# EAGLE board GPS-L86-M33-V0.1 (EAGLE 9.6.2)
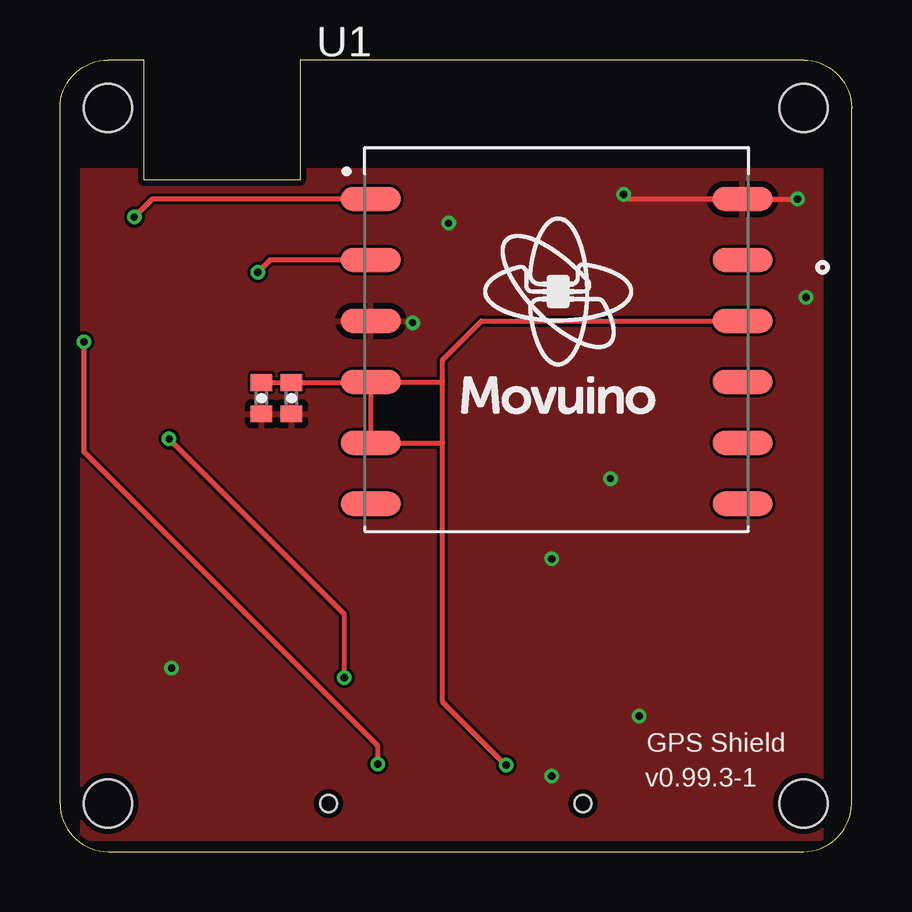
[diagram p0: board, top side]
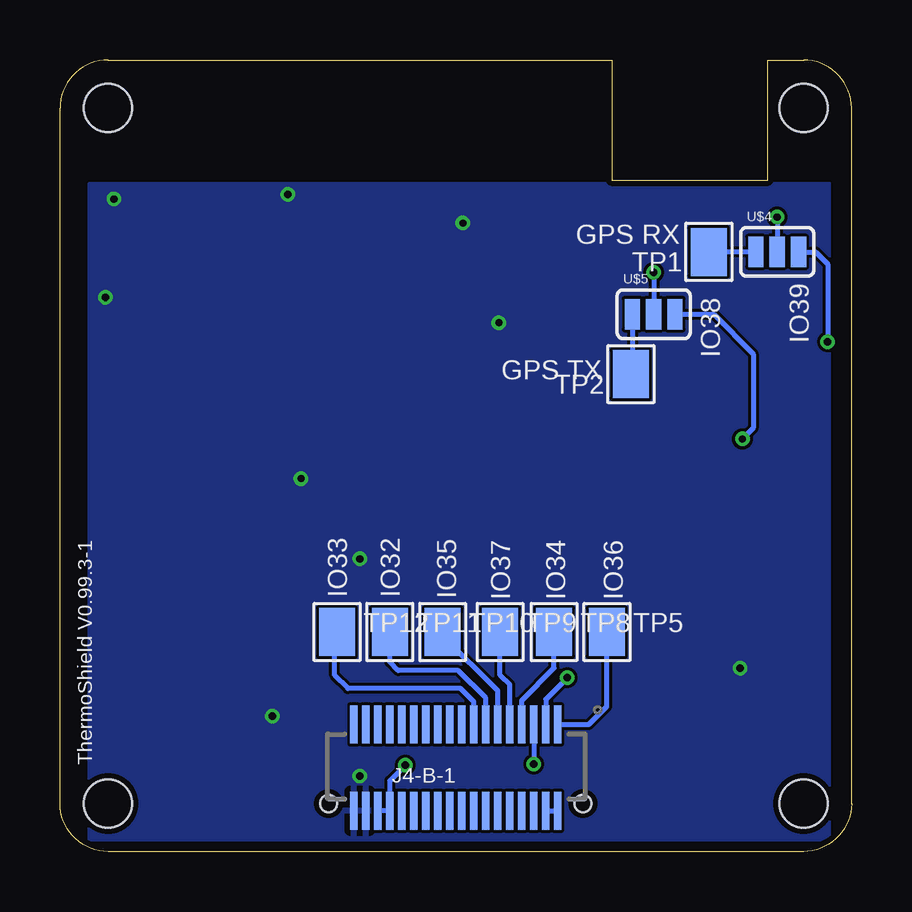
[diagram p1: board, bottom side, seen from below]

Size 33 x 33 mm. Coordinates in mm from the lower left corner, seen from the top.
Outline: 0,2 0,31 arc-90 2,33 3.5,33 3.5,28 10,28 10,33 31,33 arc-90 33,31 33,2 arc-90 31,0 2,0 arc-90 0,2
Copper layers (1*16): Top 0.035mm / dielectric 1.5mm / Bottom 0.035mm
Design rules "PCBWAY_2layer_DRU_no_angle_5mil": minimum track width 5mil, minimum drill 0.25mm, track to track 5mil, track to pad 5mil, pad to pad 5mil, via to via 5mil, smd to smd 0mil, copper to edge 10mil, drill to drill 10mil, minimum pad ring 10mil, minimum via ring 6mil, stop-mask expansion 2mil, vias tented up to drill 100mil, thermal gap 10mil
Net classes: 1 pcbway_smallest: width 0.102 mm, drill 0.2 mm, clearance 0.102 mm; 2 pcbway_cheap: width 0.152 mm, drill 0.3 mm, clearance 0.152 mm; 3 pcbway_5mil: width 0.127 mm, drill 0.25 mm, clearance 0.127 mm
Holes 2 mm at 31,31 2,2 2,31 31,2

## Footprints (pad centres in the part's own frame; a part is rotated, then mirrored left to right if it is on the bottom)
0402-CAP = smd 0.7 x 0.9: 1 -0.65,0; 2 0.65,0
DF12-36-DP-NL = smd 0.3 x 1.6: 1 -4.25,-1.8; 2 -4.25,1.8; 3 -3.75,-1.8; 4 -3.75,1.8; 5 -3.25,-1.8; 6 -3.25,1.8; 7 -2.75,-1.8; 8 -2.75,1.8; 9 -2.25,-1.8; 10 -2.25,1.8; 11 -1.75,-1.8; 12 -1.75,1.8; 13 -1.25,-1.8; 14 -1.25,1.8; 15 -0.75,-1.8; 16 -0.75,1.8; 17 -0.25,-1.8; 18 -0.25,1.8; 19 0.25,-1.8; 20 0.25,1.8; 21 0.75,-1.8; 22 0.75,1.8; 23 1.25,-1.8; 24 1.25,1.8; 25 1.75,-1.8; 26 1.75,1.8; 27 2.25,-1.8; 28 2.25,1.8; 29 2.75,-1.8; 30 2.75,1.8; 31 3.25,-1.8; 32 3.25,1.8; 33 3.75,-1.8; 34 3.75,1.8; 35 4.25,-1.8; 36 4.25,1.8 | hole 0.7: -5.3,1.5; 5.3,1.5
PAD-1.5X2.0 = smd 1.5 x 2: P$1 0,0
XCVR_L86-M33 = smd 2.5 x 1: 1 -7.75,6.35; 2 -7.75,3.81; 3 -7.75,1.27; 4 -7.75,-1.27; 5 -7.75,-3.81; 6 -7.75,-6.35; 7 7.75,-6.35; 8 7.75,-3.81; 9 7.75,-1.27; 10 7.75,1.27; 11 7.75,3.81; 12 7.75,6.35
SJ_3 = smd 0.635 x 1.27: 1 -0.889,0; 2 0,0; 3 0.889,0

## Placement (x,y rotation side)
C1  1uF  [0402-CAP]  9.65,18.9 270 top
C2  10uF  [0402-CAP]  8.4,18.9 270 top
J4-B-1  DF12-36NOLEGS-MALE  [DF12-36-DP-NL]  16.5,3.5 180 bottom
TP1  [PAD-1.5X2.0]  5.95,25 180 bottom
TP2  [PAD-1.5X2.0]  9.2,19.9 180 bottom
TP5  [PAD-1.5X2.0]  10.2,9.15 0 bottom
TP8  [PAD-1.5X2.0]  12.4,9.15 0 bottom
TP9  [PAD-1.5X2.0]  14.65,9.15 0 bottom
TP10  [PAD-1.5X2.0]  17.05,9.15 0 bottom
TP11  [PAD-1.5X2.0]  19.25,9.15 0 bottom
TP12  [PAD-1.5X2.0]  21.45,9.15 0 bottom
U1  L86-M33  [XCVR_L86-M33]  20.7,20.85 0 top
U$1  LOGO_MOVUINOTOP  [LOGO_MOVUINO_BMP_10MM]  20.7,23.35 0 top
U$4  0402-JUMPER3  [SJ_3]  3.1,25 0 bottom
U$5  0402-JUMPER3  [SJ_3]  8.25,22.4 0 bottom

## Library data of the parts
C1 C2 = movuino; DIELECTRIC: MLCC, X5R; MF: Murata Electronics; MPN: GRM155R61A105KE15D; OC_MOUSER: 81-GRM155R61A105KE15; OC_RS: 7235199; TOLERANCE: 10%; VOLTAGE: 10V
J4-B-1 TP1 TP2 TP5 TP8-TP12 U$1 U$4 U$5 = movuino
U1 = movuino; AVAILABILITY: Warning; DESCRIPTION: L86 is an ultra-compact GNSS POT (Patch on Top) module with an embedded 18.4mm × 18.4mm × 4.0mm patch antenna and utilizes the MediaTek new generation GNSS chipset MT3333 that achieves the perfect performance; MF: Quectel; MP: L86-M33; PACKAGE: LCC-12 Quectel; PRICE: None; PURCHASE-URL: https://pricing.snapeda.com/search/part/L86-M33/?ref=eda

## Nets
3.3V [pcbway_5mil]: C1.1 C2.1 J4-B-1.30 J4-B-1.32 U1.4 U1.5 U1.10
5V [pcbway_5mil]: J4-B-1.2 J4-B-1.4
!PB! [pcbway_5mil]: J4-B-1.10
BATT [pcbway_5mil]: J4-B-1.6
GND [pcbway_5mil]: C1.2 C2.2 J4-B-1.34 J4-B-1.36 U1.3 U1.12
GPIO0 [pcbway_5mil]: J4-B-1.14
GPIO2 [pcbway_5mil]: J4-B-1.35
GPS_RXD: U1.1 U$4.2
GPS_TXD: U1.2 U$5.2
IO4 [pcbway_5mil]: J4-B-1.31
IO5 [pcbway_5mil]: J4-B-1.33
IO12 [pcbway_5mil]: J4-B-1.27
IO13 [pcbway_5mil]: J4-B-1.29
IO14 [pcbway_5mil]: J4-B-1.23
IO15 [pcbway_5mil]: J4-B-1.25
IO25 [pcbway_5mil]: J4-B-1.17
IO26 [pcbway_5mil]: J4-B-1.19
IO27 [pcbway_5mil]: J4-B-1.21
IO32 [pcbway_5mil]: J4-B-1.13 TP11.P$1
IO33 [pcbway_5mil]: J4-B-1.15 TP12.P$1
IO34 [pcbway_5mil]: J4-B-1.7 TP8.P$1
IO35 [pcbway_5mil]: J4-B-1.11 TP10.P$1
IO36 [pcbway_5mil]: J4-B-1.1 TP5.P$1
IO37 [pcbway_5mil]: J4-B-1.9 TP9.P$1
IO38 [pcbway_5mil]: J4-B-1.3 U$5.3
IO39 [pcbway_5mil]: J4-B-1.5 U$4.3
MISO [pcbway_5mil]: J4-B-1.24
MOSI [pcbway_5mil]: J4-B-1.22
N$7: TP2.P$1 U$5.1
N$10: TP1.P$1 U$4.1
RESET [pcbway_5mil]: J4-B-1.12
RXD [pcbway_5mil]: J4-B-1.16
SCK [pcbway_5mil]: J4-B-1.20
SCL [pcbway_5mil]: J4-B-1.28
SDA [pcbway_5mil]: J4-B-1.26
TXD [pcbway_5mil]: J4-B-1.18
VBATT [pcbway_5mil]: J4-B-1.8

## Tracks (layer width: path | path; a pad name or v marks a point on that pad's centre or on a via)
3.3V  (via drill 0.3 pad 0.6)
  Top 0.2: v18.6,3.6 15.95,6.25 15.95,17.05 | U1.10 17.57,22.12 15.95,20.5 15.95,19.6 | 15.95,17.05 15.95,19.6 | 12.95,19.45 U1.4 15.93,19.58 15.95,19.6 | 12.95,19.45 U1.5 15.94,17.04 15.95,17.05 | 12.95,19.45 12.85,19.55 C1.1 C2.1
  Bottom 0.2: J4-B-1.32 J4-B-1.30 19.25,2.95 v18.6,3.6
5V
  Bottom 0.2: J4-B-1.4 J4-B-1.2
GND  (via drill 0.3 pad 0.6)
  Top 0.2: v30.75,27.2 U1.12 23.7,27.2 v23.5,27.4
  other vias: 20.5,3.15 24.15,5.65 14.7,22.05 16.2,26.2 4.65,7.65 22.95,15.55 31.1,23.1 20.5,12.2
  pour Top: 31.75,28.45 31.75,0.5 0.9,0.5 0.9,28.45
  pour Bottom: 31.8,27.85 31.8,0.5 0.9,0.5 0.9,27.85
GPS_RXD  (via drill 0.3 pad 0.6)
  Top 0.2: U1.1 3.85,27.2 v3.1,26.45
  Bottom 0.2: v3.1,26.45 U$4.2
GPS_TXD  (via drill 0.3 pad 0.6)
  Top 0.2: U1.2 8.76,24.66 v8.25,24.15
  Bottom 0.2: v8.25,24.15 U$5.2
IO32
  Bottom 0.2: J4-B-1.13 15.25,6.4 16.4,7.55 18.9,7.55 19.25,7.9 TP11.P$1
IO33
  Bottom 0.2: J4-B-1.15 15.75,6.25 16.3,6.8 21,6.8 21.55,7.35 21.55,9.05 TP12.P$1
IO34
  Bottom 0.2: J4-B-1.7 13.75,6.3 12.4,7.65 TP8.P$1
IO35
  Bottom 0.2: J4-B-1.11 14.75,6.7 17.05,9 TP10.P$1
IO36
  Bottom 0.2: J4-B-1.1 10.95,5.3 10.2,6.05 TP5.P$1
IO37
  Bottom 0.2: J4-B-1.9 14.25,6.95 14.65,7.35 TP9.P$1
IO38  (via drill 0.3 pad 0.6)
  Top 0.2: v4.55,17.2 11.85,9.9 v11.85,7.25
  Bottom 0.2: U$5.3 5.75,22.4 4.1,20.75 4.1,17.65 v4.55,17.2 | J4-B-1.3 12.75,6.35 v11.85,7.25 | v11.85,7.25
IO39  (via drill 0.3 pad 0.6)
  Top 0.2: v13.25,3.65 13.25,4.4 1,16.65 v1,21.25
  Bottom 0.2: J4-B-1.5 v13.25,3.65 | U$4.3 1.5,25 1,24.5 v1,21.25
N$7
  Bottom 0.2: U$5.1 9.14,19.96 TP2.P$1
N$10
  Bottom 0.2: U$4.1 TP1.P$1

## Text on the board
tPlace: GPS Shield | v0.99.3-1
bPlace: GPS RX | IO39 | IO38 | GPS TX | IO36 | IO34 | IO37 | IO35 | IO32 | IO33 | ThermoShield V0.99.3-1